# Altium PCB Platine_2_Intel_CPLD.PcbDoc (part 2 of 2)
Units mm, origin at the board's own origin, x right, y up, seen from the top; angles counter-clockwise.
Board outline 159.99 x 100 mm, 2 copper layers (Top Layer, Bottom Layer), stack 1.569 mm thick; 92 components, 117 nets, 463 pads, 99 vias.
Unrouted connection lines stored in the file: 4.
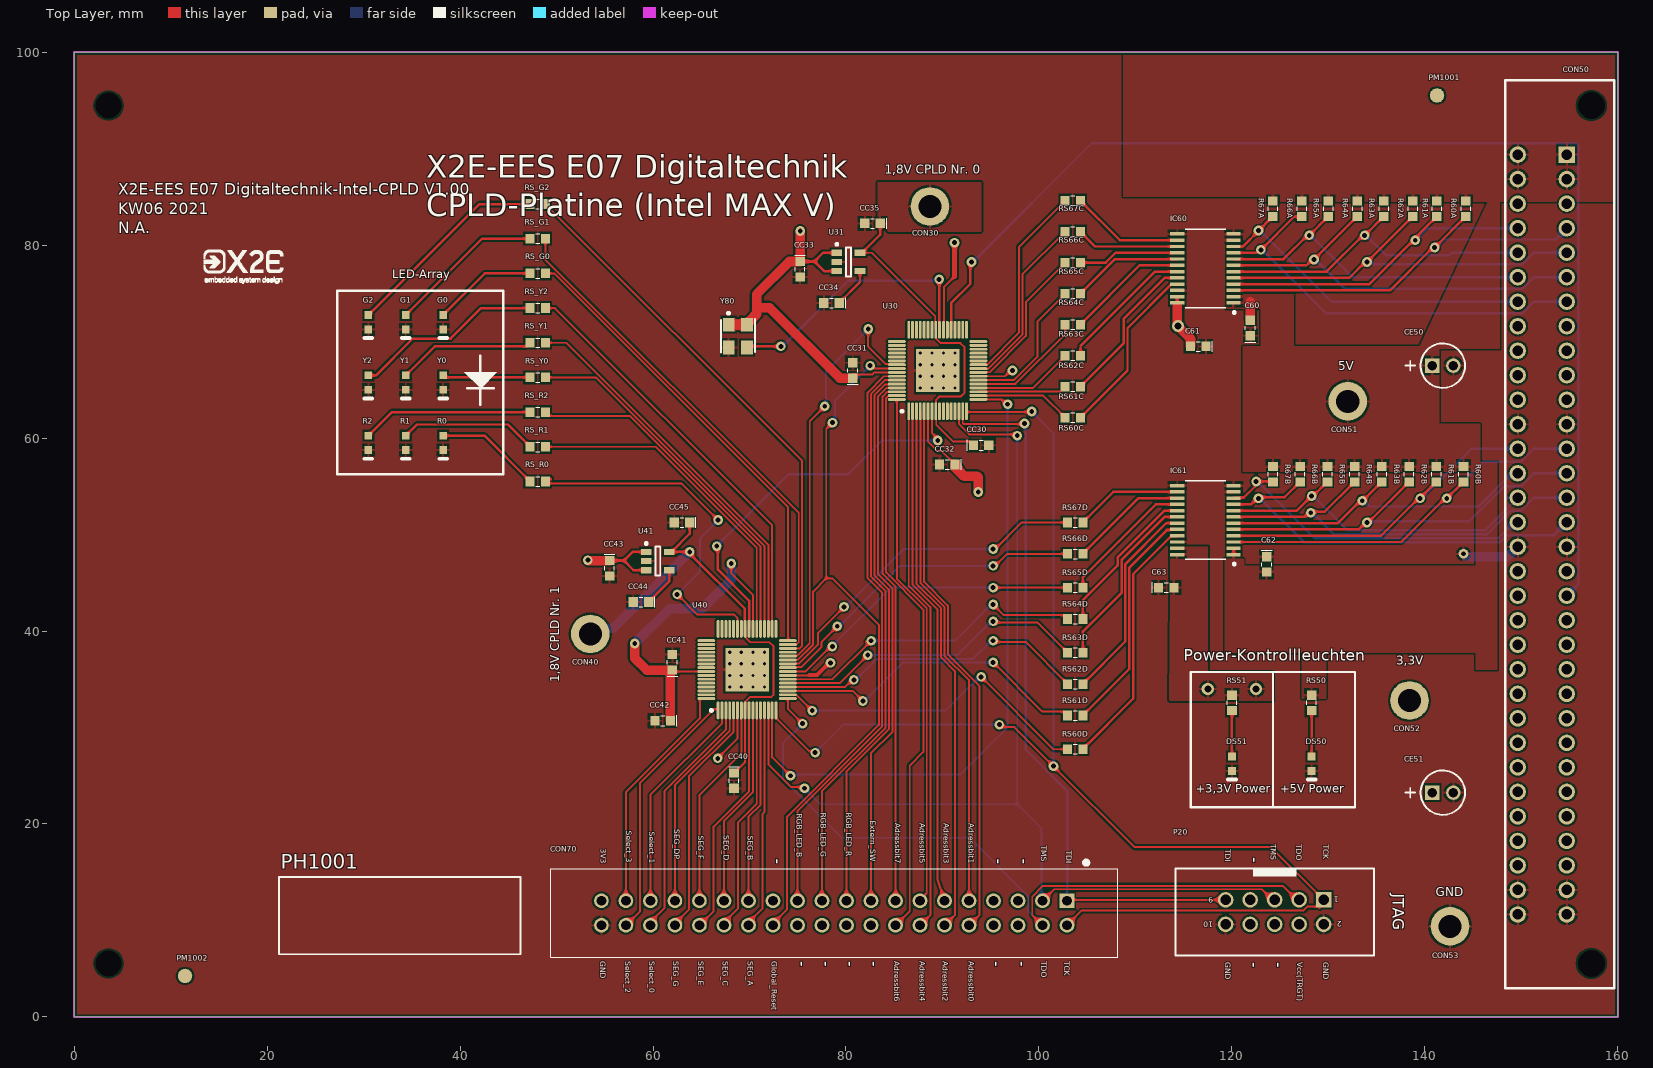
[diagram p0: Top Layer view]

## Polygon pours and split planes (outlines as drawn) (continued)
3V3 on Bottom Layer "Bottom Layer-3V3" (solid, pour order 47): 159.995,0 159.995,38.75 159.995,99.694 50,99.694 50,100 -0.25,100 -0.25,4.25 -0.5,4.25 -0.5,-0.25 114,0.001
GND on Bottom Layer "GND_L02_P020" (solid, pour order 20): 86.75,54.5 86.75,58.25 90.25,58.25 90.25,62.25 86.75,62.25 86.75,70.5 157,70.5 157,60 101.5,60 101.5,67.729 92.521,67.729 92.521,54.5
GND on Bottom Layer "GND_L02_P026" (solid, pour order 26): 66.6,33.8 66.111,38.611 85.688,58.188 89.544,58.188
GND on Bottom Layer "GND_L02_P024" (solid, pour order 24): 92.5,61.5 95.5,61.5 95.5,55.5 92.5,55.5
GND on Bottom Layer "GND_L02_P025" (solid, pour order 25): 59.25,38.75 59.25,33.25 74.5,33.25 74.5,38.75
VCC_INT_CPLD1 on Bottom Layer "VCC_INT_CPLD1_L02_P049" (solid, pour order 49): 51,42.1 56.6,42.1 56.6,36.5 51,36.5
GND on Bottom Layer "GND_L02_P014" (solid, pour order 14): 106.25,60 106.25,58.75 118.75,58.75 118.75,60

## Keep-outs
KeepOutLayer:
  the board outline again, w0.2

## Silkscreen, mask and mechanical layers (free items; w line width, h text height)
Top Overlay:
  drawing of 1181 lines, arcs and shapes, not listed
  text "1,8V CPLD Nr. 0" at 84,87.093 h1.52
  text "X2E-EES E07 Digitaltechnik / CPLD-Platine (Intel MAX V)" at 36.5,82.2 h4
  text "X2E-EES E07 Digitaltechnik-Intel-CPLD V1.00 / KW06 2021  / N.A." at 4.6,80.8 h2
  text "LED-Array" at 33,76.25 h1.5
  text "5V" at 131.021,66.709 h1.52
  text "Power-Kontrollleuchten" at 115,36.52 h2
  text "3,3V" at 137,36.193 h1.52
  text "1,8V CPLD Nr. 1" at 50.607,34.7 h1.52 r90
  text "+3,3V Power" at 116.25,22.94 h1.5
  text "+5V Power" at 125,22.944 h1.5
  text "RGB_LED_G" at 77.2,21.149 h1 r270
  text "RGB_LED_R" at 79.8,21.144 h1 r270
  text "RGB_LED_B" at 74.7,21.059 h1 r270
  text "Extern_SW" at 82.3,20.349 h1 r270
  text "Adressbit7" at 84.91,20.091 h1 r270
  text "Adressbit5" at 87.411,20.091 h1 r270
  text "Adressbit3" at 89.911,20.091 h1 r270
  text "Adressbit1" at 92.51,20.091 h1 r270
  text "SEG_DP" at 62,19.455 h1 r270
  text "Select_3" at 57,19.305 h1 r270
  text "Select_1" at 59.4,19.182 h1 r270
  text "SEG_D" at 67.1,18.85 h1 r270
  text "SEG_B" at 69.6,18.8 h1 r270
  text "SEG_F" at 64.5,18.757 h1 r270
  text "TMS" at 100.011,17.727 h1 r270
  text "3V3" at 54.4,17.419 h1 r270
  text "TDI" at 102.6,17.246 h1 r270
  text "-" at 72.015,16.389 h2 r270
  text "-" at 94.915,16.389 h2 r270
  text "-" at 97.515,16.389 h2 r270
  text "JTAG" at 136.272,12.754 h2 r270
  text "GND" at 141.121,12.209 h1.52
  text "GND" at 54.3,5.8 h1 r270
  text "Select_2" at 56.9,5.8 h1 r270
  text "Select_0" at 59.4,5.8 h1 r270
  text "SEG_G" at 61.9,5.8 h1 r270
  text "SEG_E" at 64.5,5.8 h1 r270
  text "SEG_C" at 67,5.8 h1 r270
  text "SEG_A" at 69.6,5.8 h1 r270
  text "Global_Reset" at 72.1,5.8 h1 r270
  text "-" at 74.515,5.8 h2 r270
  text "-" at 77.015,5.8 h2 r270
  text "-" at 79.515,5.8 h2 r270
  text "-" at 82.015,5.8 h2 r270
  text "Adressbit6" at 84.811,5.8 h1 r270
  text "Adressbit4" at 87.41,5.8 h1 r270
  text "Adressbit2" at 89.81,5.8 h1 r270
  text "Adressbit0" at 92.511,5.8 h1 r270
  text "-" at 94.715,5.8 h2 r270
  text "-" at 97.315,5.8 h2 r270
  text "TDO" at 100.011,5.8 h1 r270
  text "TCK" at 102.411,5.8 h1 r270

## Text inside footprints (layer, text, board x,y; h text height)
IC60: Dimensions "*" at 119.434,74.972 h1 r180
IC61: Dimensions "*" at 119.434,48.897 h1 r180
P20: Top Overlay "-" at 121.372,5.682 h2 r270; Top Overlay "1" at 131.06,12.67 h1 r180; Top Overlay "2" at 131.36,10.13 h1 r180; Top Overlay "10" at 118.08,10.07 h1 r180; Top Overlay "9" at 118.08,12.61 h1 r180; Top Overlay "TCK" at 129.274,17.827 h1 r270; Top Overlay "TDO" at 126.477,17.887 h1 r270; Top Overlay "TMS" at 123.834,17.881 h1 r270; Top Overlay "-" at 121.416,16.545 h2 r270; Top Overlay "TDI" at 119.1,17.4 h1 r270; Top Overlay "GND" at 129.274,5.682 h1 r270; Top Overlay "Vcc(TRGT)" at 126.579,5.681 h1 r270; Top Overlay "GND" at 119.114,5.682 h1 r270; Top Overlay "-" at 123.912,5.682 h2 r270